# EAGLE board teensyLC-midi-IO_02 one-hole (EAGLE 7.5.0)
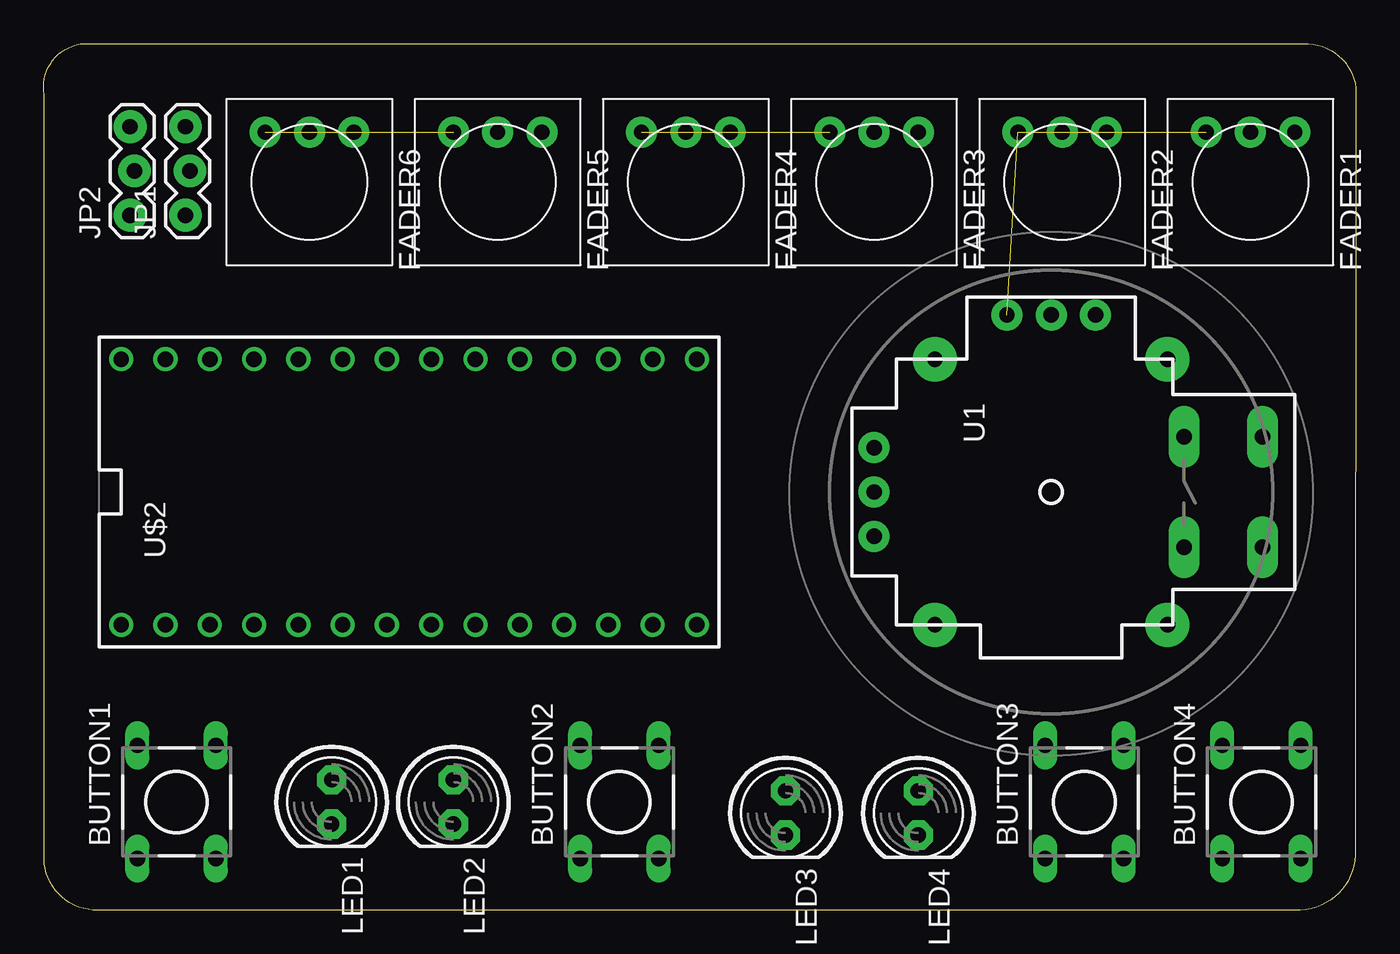
[diagram p0: board, top side]
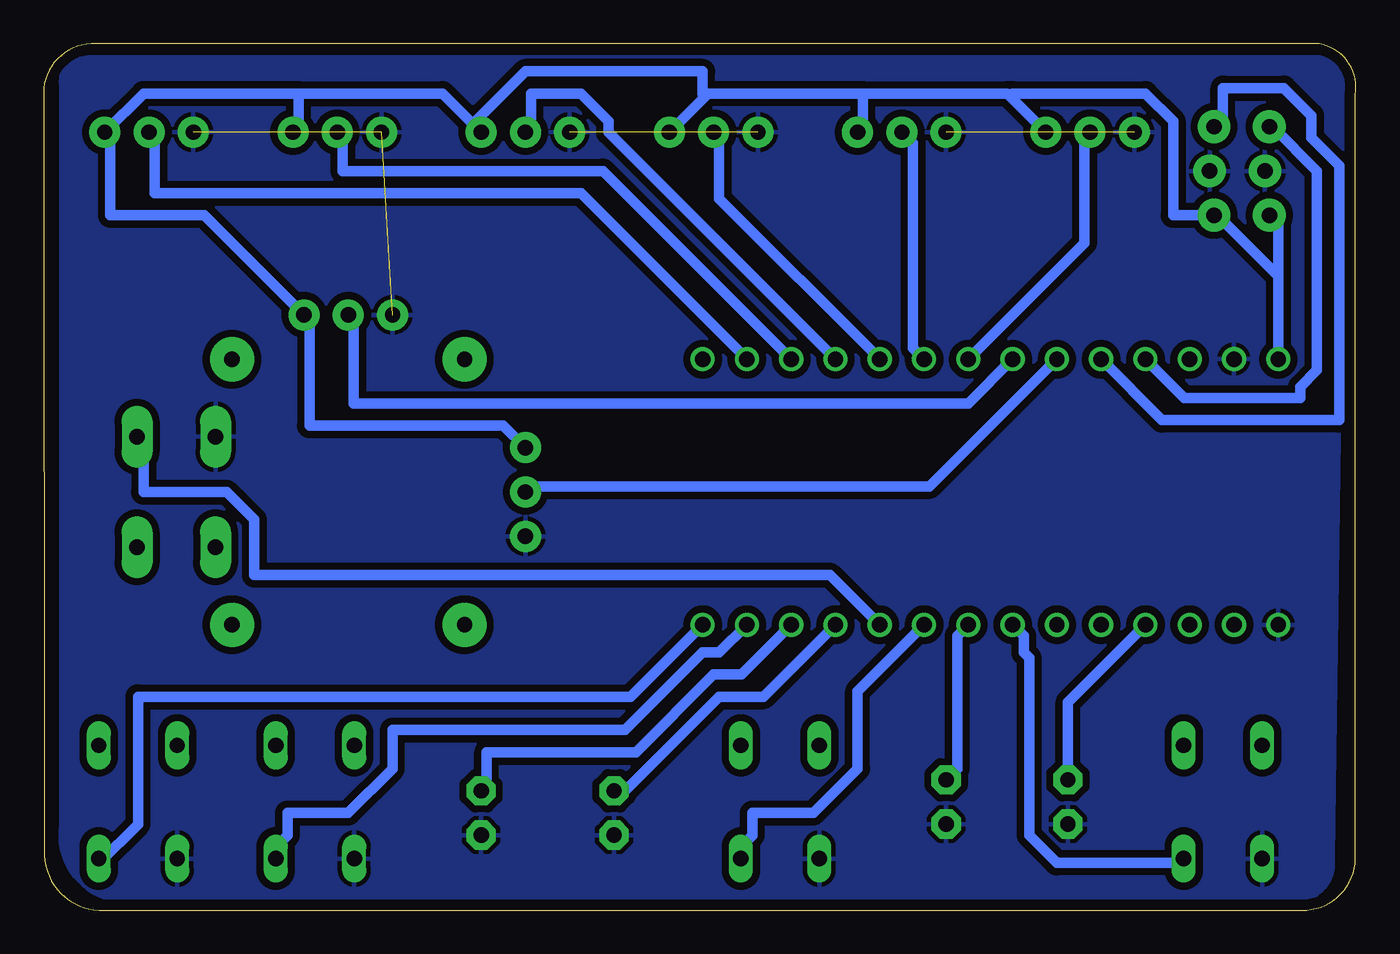
[diagram p1: board, bottom side, seen from below]

Size 75.27 x 49.72 mm. Coordinates in mm from the lower left corner, seen from the top.
Outline: 75.24,3.15 arc-90 71.79,0 2.83,0.01 arc-90 0.04,3.22 0.04,46.79 arc-90 2.09,49.7 72.01,49.7 arc-90 75.27,47.17 75.24,3.15
Copper layers (1*16): Top 0.035mm / dielectric 1.5mm / Bottom 0.035mm
Design rules "default *": minimum track width 24mil, minimum drill 24mil, track to track 16mil, track to pad 16mil, pad to pad 16mil, via to via 6mil, smd to smd 6mil, copper to edge 24mil, drill to drill 24mil, minimum pad ring 10mil, minimum via ring 8mil, stop-mask expansion 4mil, vias tented up to drill 0mil, thermal gap 10mil
Net classes: 0 default: width 0.152 mm, drill 0.88 mm, clearance 0.152 mm; 1 GND: width 0.508 mm, drill 0.88 mm, clearance 0.152 mm; 2 Power: width 0.508 mm, drill 0.88 mm, clearance 0.152 mm

## Footprints (pad centres in the part's own frame; a part is rotated, then mirrored left to right if it is on the bottom)
DTS-6 = drill 0.88 long: 1 -3.25,2.25; 2 3.25,2.25; 3 -3.25,-2.25; 4 3.25,-2.25
TRIM-3386 = drill 0.88 pad 1.778: 1 -2.54,-2.857; 2 0,-2.857; 3 2.54,-2.857
1X03_LOCK = drill 0.88 pad 1.88: 1 0,0.127; 2 2.54,-0.127; 3 5.08,0.127
LED5MM = drill 0.88 pad 1.676 octagon: A -1.27,0; K 1.27,0
JOYSTICK = drill 0.88 pad 1.778 long: B1A -3.175,12.12; B1B 3.175,12.12; B2A -3.175,7.62; B2B 3.175,7.62 | drill 0.88 pad 1.778: H1 -2.54,-10.16; H2 0,-10.16; H3 2.54,-10.16; V1 -10.16,2.54; V2 -10.16,0; V3 -10.16,-2.54 | drill 0.88 pad 2.54: MOUNT1 -7.62,6.668; MOUNT2 -7.62,-6.668; MOUNT3 7.62,-6.668; MOUNT4 7.62,6.668
TEENSY_3.0-3.2&LC_DIL = drill 0.88: 0 -7.62,13.97; 1 -7.62,11.43; 2 -7.62,8.89; 3 -7.62,6.35; 3.3V 7.62,11.43; 4 -7.62,3.81; 5 -7.62,1.27; 6 -7.62,-1.27; 7 -7.62,-3.81; 8 -7.62,-6.35; 9 -7.62,-8.89; 10 -7.62,-11.43; 11 -7.62,-13.97; 12 -7.62,-16.51; 13 7.62,-16.51; 14/A0 7.62,-13.97; 15/A1 7.62,-11.43; 16/A2 7.62,-8.89; 17/A3 7.62,-6.35; 18/A4 7.62,-3.81; 19/A5 7.62,-1.27; 20/A6 7.62,1.27; 21/A7 7.62,3.81; 22/A8 7.62,6.35; 23/A9 7.62,8.89; AGND 7.62,13.97; GND -7.62,16.51; VIN 7.62,16.51

## Placement (x,y rotation side)
BUTTON1  DTS-6  [DTS-6]  7.63,6.21 90 top
BUTTON2  DTS-6  [DTS-6]  33.03,6.21 90 top
BUTTON3  DTS-6  [DTS-6]  59.7,6.21 90 top
BUTTON4  DTS-6  [DTS-6]  69.86,6.21 90 top
FADER1  [TRIM-3386]  69.22,41.77 180 top
FADER2  [TRIM-3386]  58.43,41.77 180 top
FADER3  [TRIM-3386]  47.63,41.77 180 top
FADER4  [TRIM-3386]  36.84,41.77 180 top
FADER5  [TRIM-3386]  26.04,41.77 180 top
FADER6  [TRIM-3386]  15.25,41.77 180 top
JP1  [1X03_LOCK]  8.26,39.87 90 top
JP2  [1X03_LOCK]  5.09,39.87 90 top
LED1  [LED5MM]  16.52,6.21 270 top
LED2  [LED5MM]  23.5,6.21 270 top
LED3  [LED5MM]  42.55,5.58 270 top
LED4  [LED5MM]  50.17,5.58 270 top
U1  JOYSTICKPTH  [JOYSTICK]  57.79,23.99 270 top
U$2  TEENSY_LC_DIL  [TEENSY_3.0-3.2&LC_DIL]  20.96,23.99 90 top

## Library data of the parts
BUTTON1-BUTTON4 = switch-tact
FADER1-FADER6 LED1-LED4 U1 = adafruit
JP1 JP2 = SparkFun-Connectors
U$2 = Teensy_3_and_LC_Series_Boards_v1.4

## Nets
3.3V: U$2.3.3V
+5V [Power]: FADER1.1 FADER2.1 FADER3.1 FADER4.1 FADER5.1 FADER6.1 JP1.1 JP2.1 U1.H1 U1.V1 U$2.VIN
ANALOG1: JP1.3 U$2.22/A8
ANALOG2: JP2.3 U$2.23/A9
BUTTON1: BUTTON1.3 U$2.5
BUTTON2: BUTTON2.3 U$2.7
BUTTON3: BUTTON3.3 U$2.11
BUTTON4: BUTTON4.3 U$2.12
FADER1: FADER1.2 U$2.14/A0
FADER2: FADER2.2 U$2.15/A1
FADER3: FADER3.2 U$2.16/A2
FADER4: FADER4.2 U$2.17/A3
FADER5: FADER5.2 U$2.18/A4
FADER6: FADER6.2 U$2.19/A5
GND [GND]: BUTTON1.1 BUTTON2.1 BUTTON3.1 BUTTON4.1 FADER1.3 FADER2.3 FADER3.3 FADER4.3 FADER5.3 FADER6.3 JP1.2 JP2.2 LED1.K LED2.K LED3.K LED4.K U1.B2A U1.H3 U1.V3 U$2.AGND U$2.GND
JOY1: U1.V2 U$2.20/A6
JOY2: U1.H2 U$2.21/A7
JOYBUTTON1: U1.B1A U$2.8
LED1: LED1.A U$2.2
LED2: LED2.A U$2.6
LED3: LED3.A U$2.9
LED4: LED4.A U$2.10
LEDBUILTIN: U$2.13
MOTOR-DIR1: U$2.0
MOTOR-DIR2: U$2.1
MOTOR-PWM1: U$2.3
MOTOR-PWM2: U$2.4

## Tracks (layer width: path | path; a pad name or v marks a point on that pad's centre or on a via)
+5V
  Bottom 0.61: U1.H1 48.9,27.8 60.02,27.8 60.02,33.83 U1.V1 66.05,39.87 71.44,39.87 71.44,44.63 FADER1.1 69.54,46.85 60.65,46.85 | 60.65,46.85 52.39,46.85 FADER3.1 50.49,45.27 47.63,48.12 37.47,48.12 37.47,46.85 37.31,46.69 | 60.65,46.85 60.65,44.95 FADER2.1 | 4.45,36.38 4.45,39.55 4.77,39.87 JP2.1 | 4.45,36.38 U$2.VIN | 4.45,36.38 7.94,39.87 JP1.1 10.49,39.87 10.49,45.27 12.07,46.85 19.69,46.85 19.85,46.69 | 19.85,46.69 20.01,46.85 28.26,46.85 | 19.85,46.69 FADER6.1 | 28.26,46.85 28.26,44.95 FADER5.1 | 37.31,46.69 37.15,46.85 28.26,46.85 | 37.31,46.69 FADER4.1
ANALOG1
  Bottom 0.61: U$2.22/A8 11.12,28.12 0.96,28.12 0.96,42.72 2.55,44.31 2.55,45.58 4.13,47.17 7.63,47.17 7.63,45.27 7.94,44.95 JP1.3
ANALOG2
  Bottom 0.61: U$2.23/A9 9.85,29.39 3.18,29.39 3.18,30.03 2.23,30.98 2.23,42.41 4.77,44.95 JP2.3
BUTTON1
  Bottom 0.61: U$2.5 19.06,15.74 19.06,14.78 18.74,14.47 18.74,4.31 17.15,2.72 10.17,2.72 BUTTON1.3
BUTTON2
  Bottom 0.61: U$2.7 28.58,12.56 28.58,8.12 31.12,5.58 34.61,5.58 34.61,4.31 35.25,3.67 35.25,3.04 BUTTON2.3
BUTTON3
  Bottom 0.61: U$2.11 36.52,14.78 37.47,14.78 41.92,10.34 55.25,10.34 55.25,8.12 57.79,5.58 61.28,5.58 61.28,4.31 61.92,3.67 61.92,3.04 BUTTON3.3
BUTTON4
  Bottom 0.61: U$2.12 41.6,12.25 69.86,12.25 69.86,4.94 72.08,2.72 BUTTON4.3
FADER1
  Bottom 0.61: U$2.14/A0 44.46,41.14 68.91,41.14 68.91,44.31 FADER1.2
FADER2
  Bottom 0.61: U$2.15/A1 43.19,42.41 58.11,42.41 58.11,44.31 FADER2.2
FADER3
  Bottom 0.61: U$2.16/A2 42.87,44.63 42.87,45.27 44.46,46.85 47.32,46.85 47.32,44.95 FADER3.2
FADER4
  Bottom 0.61: U$2.17/A3 36.52,40.82 36.52,44.31 FADER4.2
FADER5
  Bottom 0.61: U$2.18/A4 25.41,32.25 25.41,44 FADER5.2
FADER6
  Bottom 0.61: U$2.19/A5 15.57,38.28 15.57,44.31 FADER6.2
GND  (4 unrouted)
  pour Bottom: 0.64,47.23 1.28,3.04 arc90 3.18,0.5 71.13,0.5 arc90 74.3,4.94 74.3,47.23 arc90 73.03,49.14 2.55,49.14 arc90
JOY1
  Bottom 0.61: U$2.20/A6 22.23,29.07 57.47,29.07 57.47,33.83 U1.V2
JOY2
  Bottom 0.61: U$2.21/A7 24.46,24.31 47.63,24.31 U1.H2
JOYBUTTON1
  Bottom 0.61: U$2.8 30.17,19.23 63.19,19.23 63.19,22.41 64.78,23.99 69.54,23.99 69.54,26.85 69.86,27.17 U1.B1A
LED1
  Bottom 0.61: U$2.2 16.52,11.93 LED1.A
LED2
  Bottom 0.61: U$2.6 22.87,15.74 22.87,8.12 LED2.A
LED3
  Bottom 0.61: U$2.9 33.98,12.25 36.52,12.25 41.92,6.85 LED3.A
LED4
  Bottom 0.61: U$2.10 35.25,13.51 36.84,13.51 41.28,9.07 49.85,9.07 49.85,7.17 LED4.A